# Altium PCB Soldeerstation.PcbDoc
Units mil, origin at the board's own origin, x right, y up, seen from the top; angles counter-clockwise.
Board outline 5660 x 3530 mil, 2 copper layers (Top Layer, Bottom Layer); 76 components, 79 nets, 288 pads, 50 vias.
Unrouted connection lines stored in the file: 2.
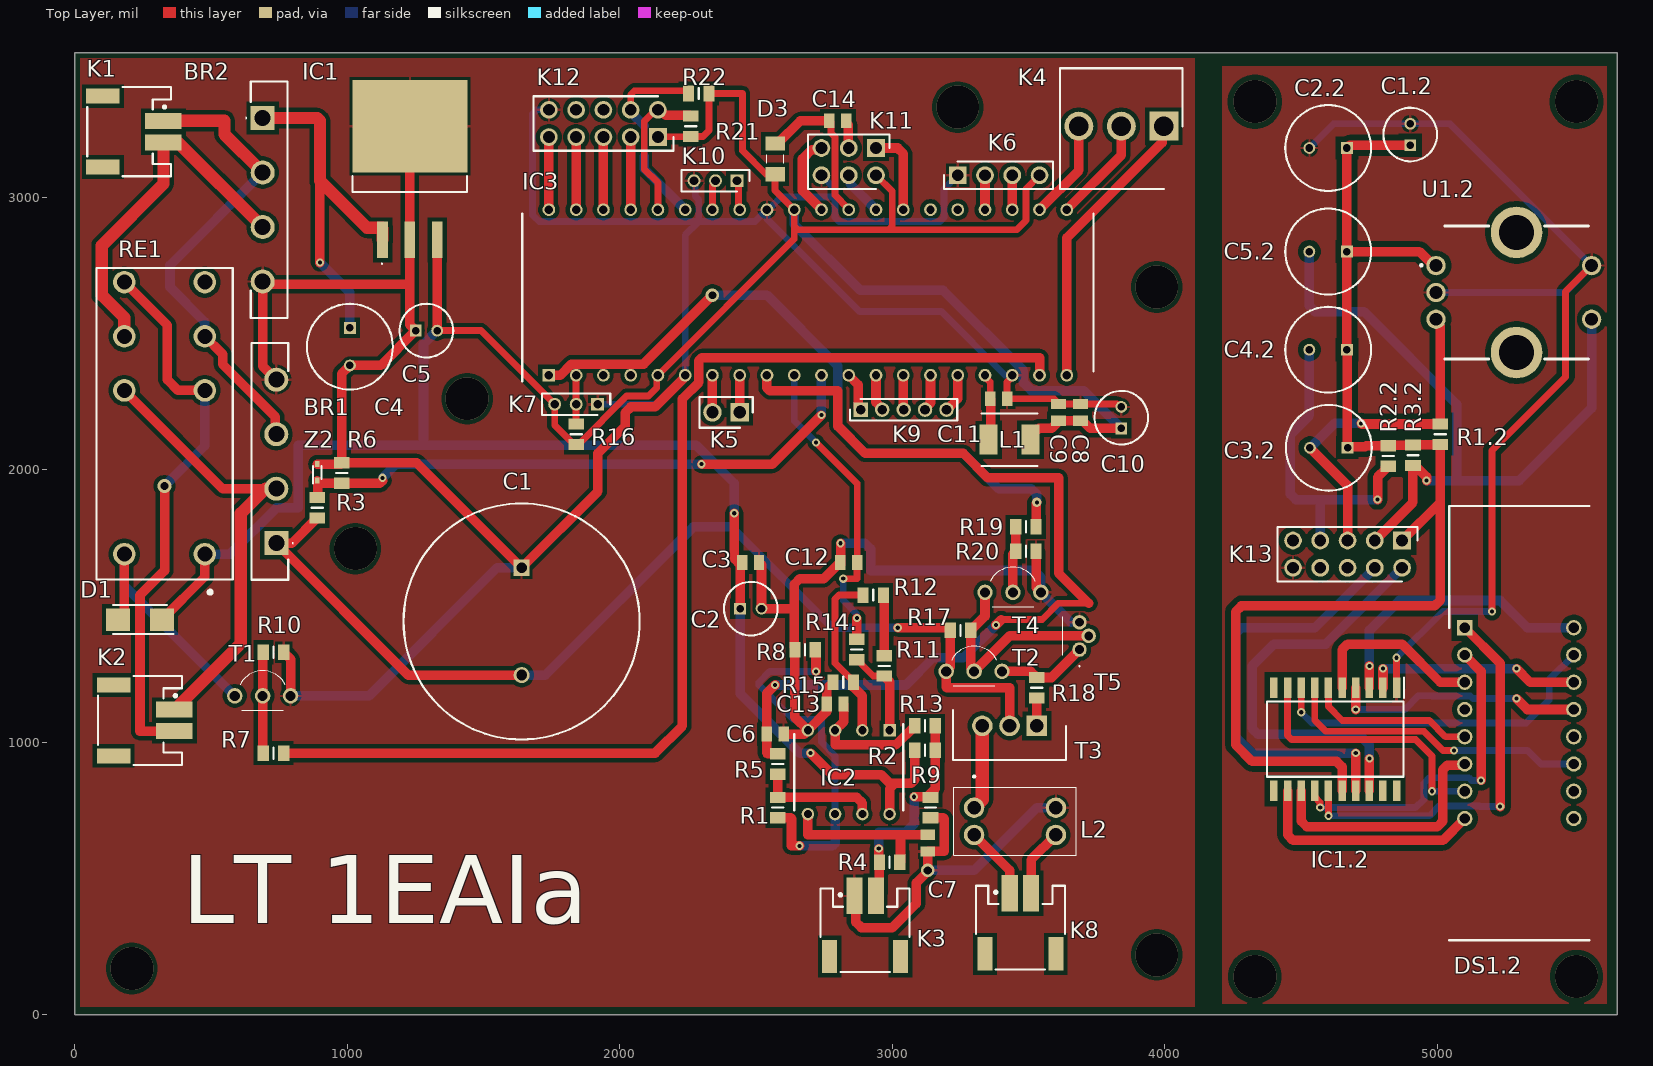
[diagram p0: Top Layer view]
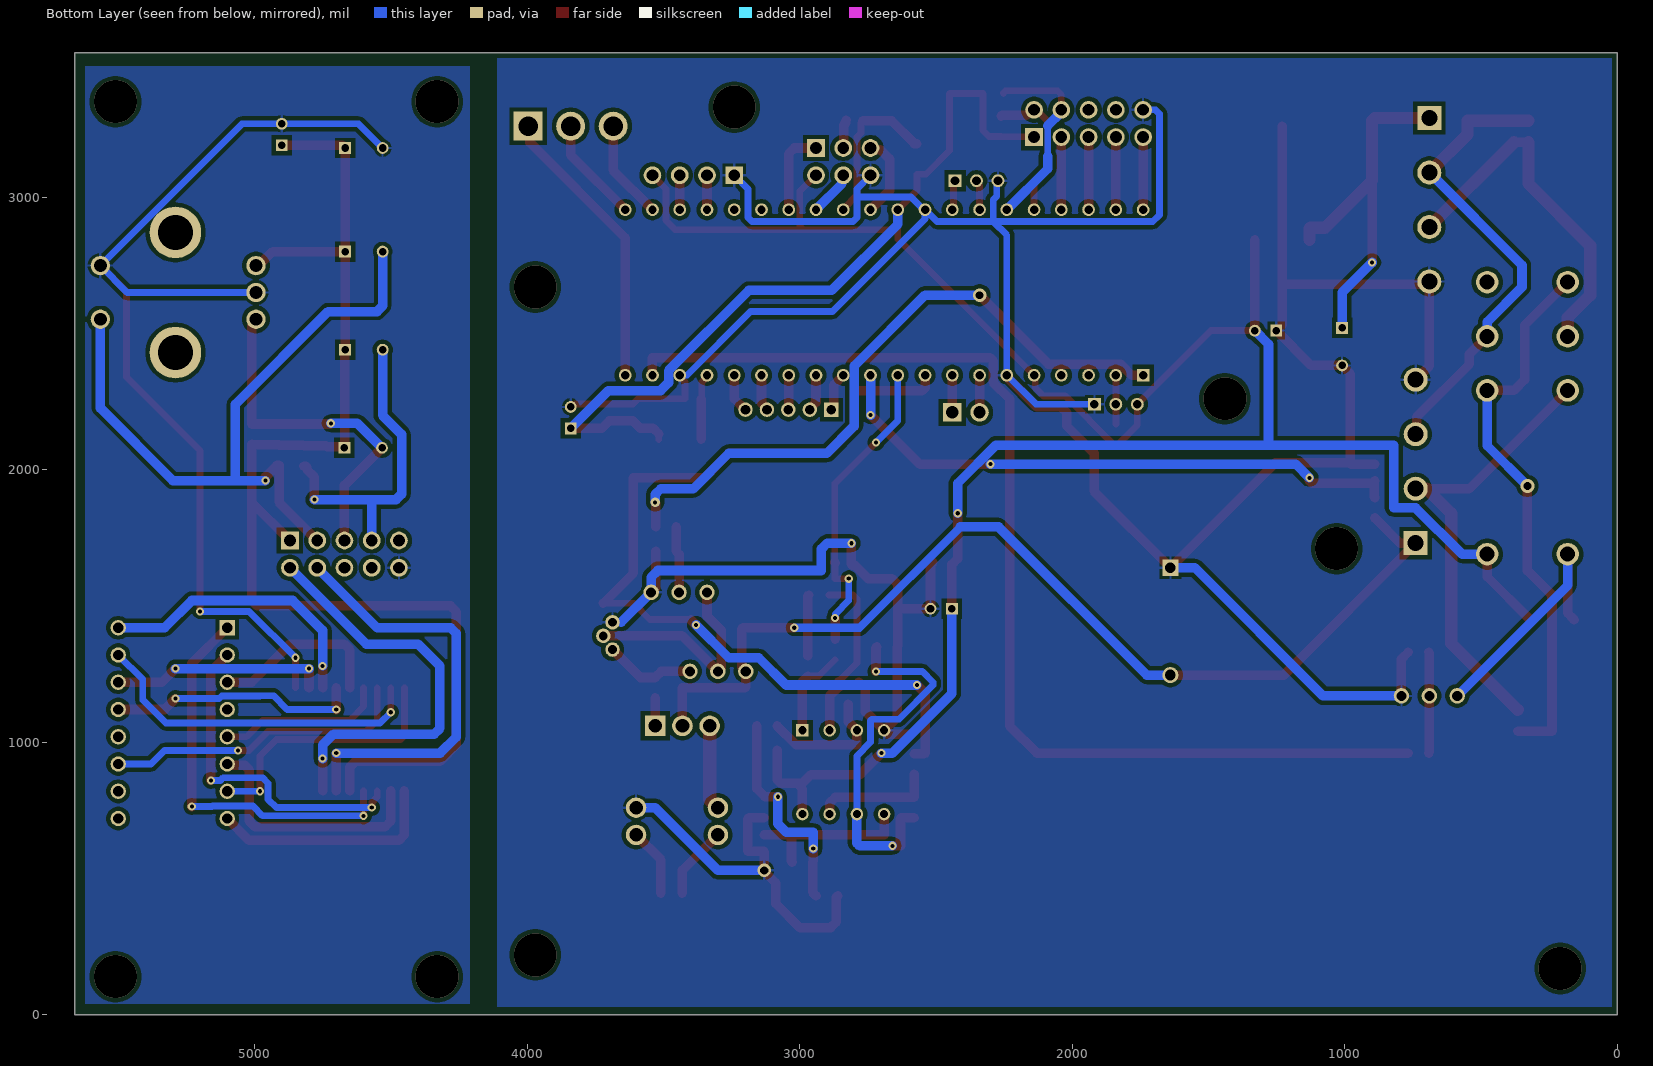
[diagram p1: Bottom Layer view, seen from below]
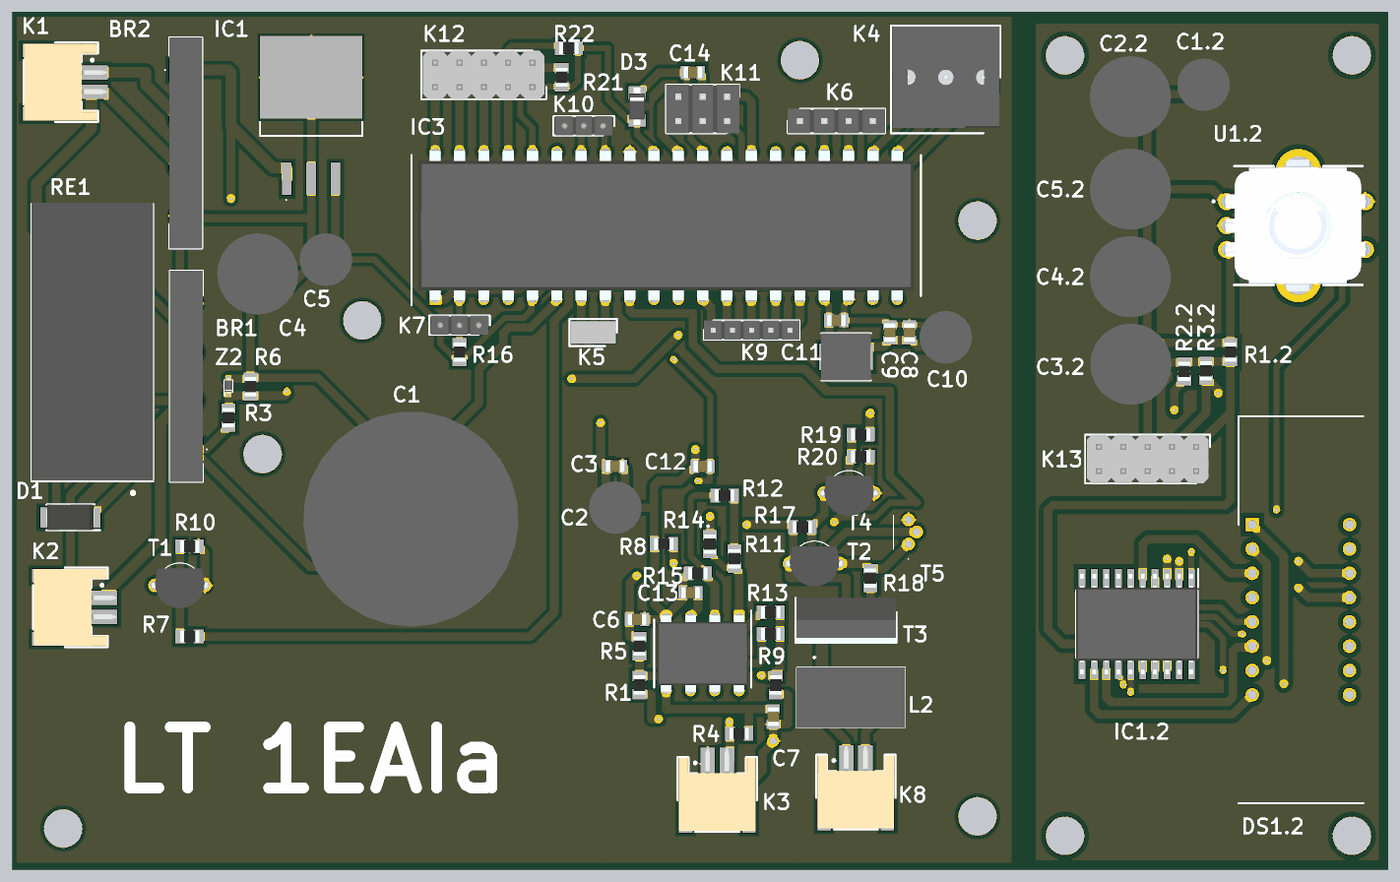
[diagram p2: 3D render of the assembled board from above, using the file's embedded part models]

## Layer stack, top to bottom
Top Solder: solder mask 0.4, Solder Resist, Dk 3.5
Top Layer: signal copper 1.4
Dielectric 1: dielectric 12.6, FR-4, Dk 4.8
Bottom Layer: signal copper 1.4
Bottom Solder: solder mask 0.4, Solder Resist, Dk 3.5

## Board outline
0,3530 5660,3530 5660,0 0,0
board region "Layer Stack Region 1": 4150,0 0,0 0,3530 4149.89,3530
board region "Layer Stack Region 1": 4149.89,3530 5660,3530 5660,0 4150,0

## Design rules (kind name [scope] priority, off if disabled: settings)
Clearance Clearance_10 [InNamedPolygon('GND_L02_P004')] p1: gap=15 ignorepadtopadclearanceinfootprint=FALSE
Clearance Clearance_9 [InNamedPolygon('NONET_L02_P003')] p2: gap=15 ignorepadtopadclearanceinfootprint=FALSE
Clearance Clearance_8 [InNamedPolygon('GND_L01_P005')] p3: gap=15 ignorepadtopadclearanceinfootprint=FALSE
Clearance Clearance_7 [InNamedPolygon('NONET_L01_P002')] p4: gap=20 ignorepadtopadclearanceinfootprint=FALSE
Clearance Clearance_6 [InNamedPolygon('NONET_L02_P000')] p5: gap=20 ignorepadtopadclearanceinfootprint=FALSE
Clearance Clearance_5 [InNamedPolygon('NONET_L01_P001')] p6: gap=20 ignorepadtopadclearanceinfootprint=FALSE
Clearance Clearance_4 [InNamedPolygon('NONET_L01_P001')] p7: gap=10 ignorepadtopadclearanceinfootprint=FALSE except(0: Arc-Hole Track-Hole SMDPad-Hole THPad-Hole Via-Hole Fill-Hole Poly-Hole Region-Hole Text-Hole; 20: Fill-Fill Fill-Poly Fill-Region Poly-Poly Poly-Region Region-Region)
Clearance Clearance_3 [InNamedPolygon('NONET_L02_P000')] p8: gap=10 ignorepadtopadclearanceinfootprint=FALSE except(0: Arc-Hole Track-Hole SMDPad-Hole THPad-Hole Via-Hole Fill-Hole Poly-Hole Region-Hole Text-Hole; 20: Fill-Text Poly-Text Region-Text)
Clearance Clearance_2 [InNamedPolygon('NONET_L02_P000')] p9: gap=10 ignorepadtopadclearanceinfootprint=FALSE except(0: Arc-Hole Track-Hole SMDPad-Hole THPad-Hole Via-Hole Fill-Hole Poly-Hole Region-Hole Text-Hole; 20: Fill-Fill Fill-Poly Fill-Region Poly-Poly Poly-Region Region-Region)
Clearance Clearance_1 [InNamedPolygon('NONET_L02_P000')] p10: gap=10 ignorepadtopadclearanceinfootprint=FALSE except(0: Arc-Hole Track-Hole SMDPad-Hole THPad-Hole Via-Hole Fill-Hole Poly-Hole Region-Hole Text-Hole)
Clearance [All] p11: gap=0.25 ignorepadtopadclearanceinfootprint=FALSE except(0: Arc-Hole Track-Hole SMDPad-Hole THPad-Hole Via-Hole Fill-Hole Poly-Hole Region-Hole Text-Hole)
HoleSize [All] p1: absolutevalues=TRUE maxlimit=200 minlimit=1 maxpercent=80.000 minpercent=20.000
PolygonConnect [All] p1: connectstyle=Relief reliefconductorwidth=10 reliefentries=4 polygonreliefangle="90 Angle" airgapwidth=10
RoutingVias [All] p1: holewidth=43.31 width=43.31 viastyle="Through Hole" minholewidth=43.31 minwidth=43.31 maxholewidth=43.31 maxwidth=43.31
SolderMaskExpansion [All] p1: expansion=4 istentingtop=FALSE
Width [All] p1: maxlimit=50 minlimit=20 preferedwidth=35 minimp=50.000000 maximp=50.000000 favimp=50.000000
29 further rules are at their usual default settings.

## Classes and differential pairs
component class Voeding: BR1 BR2 C1 C4 C5 D1 IC1 K1 K2 R3 R6 R7 R10 RE1 T1 Z2
component class Display: C1.2 C2.2 C3.2 C4.2 C5.2 DS1.2 IC1.2 K13 R1.2 R2.2 R3.2 U1.2
component class Boutconectie: C2 C3 C6 C7 C12 C13 IC2 K3 K8 L2 R1 R2 R4 R5 R8 R9 R11 R12 R13 R14. R15 R17 R18 R19 R20 T2 T3 T4 T5
component class Atmega: C8 C9 C10 C11 C14 D3 IC3 K4 K5 K6 K7 K9 K10 K11 K12 L1 R16 R21 R22

## Components (designator, comment, footprint, x,y, rotation, side; value= is the part's Value field where it differs from the comment)
BR1 "GBU6J-E3_45" GBU6JE345 740,1730 r270 top
BR2 "GBU6J-E3_45" GBU6JE345 690,3290 r90 top
C1 "4700µ" CAPPRD1000W80D2200H4100 1640,1640 r270 top
C1.2 "100µ" CAPPRD200W52D500H1250 4900,3190 r90 top
C2 "10µ" CAPPRD200W52D500H1250 2441.26,1490 r0 top
C2.2 "860010674014" CAPPRD350W52D800H1300 4667.8,3180 r180 top
C3 "" CAPC2012X95N 2480,1660 r180 top
C3.2 "860010674014" CAPPRD350W52D800H1300 4670,2080 r180 top
C4 "100µ" CAPPRD350W52D800H1300 1010,2520 r270 top
C4.2 "860010674014" CAPPRD350W52D800H1300 4667.8,2440 r180 top
C5 "10µ" CAPPRD200W52D500H1250 1251.26,2510 r0 top
C5.2 "860010674014" CAPPRD350W52D800H1300 4667.8,2800 r180 top
C6 "" CAPC2012X95N 2570,1030 r180 top
C7 "" CAPC2012X95N 3130,630 r90 top
C8 "" CAPC2012X95N 3690,2210 r270 top
C9 "" CAPC2012X95N 3610,2210 r270 top
C10 "10µ" CAPPRD200W52D500H1250 3840,2151.26 r90 top
C11 "" CAPC2012X95N 3390,2260 r180 top
C12 "" CAPC2012X95N 2840,1660 r0 top
C13 "" CAPC2012X95N 2790,1140 r0 top
C14 "" CAPC2012X95N 2800,3280 r180 top
D1 "1N4007_SMD" DIOM5027X262N 240,1450 r180 top
D3 "1N4148" 1N4148WRHG 2570,3140 r90 top
DS1.2 "TDCG1050M" DIPS1016W75P254L4020H725Q16N 5100,1420 r0 top
IC1 "TL780-05CKTTR" TL78005CKTTR 1230,3108.23 r0 top
IC1.2 "TM1637__SOP_" SOIC127P1045X280-20N 4625,1011.02 r270 top
IC2 "MCP6002-E_P" DIP781W56P254L950H533Q8N 2840,890 r270 top
IC3 "ATMEGA4809-PF" DIP1543W58P254L5175H635Q40N 2690,2650 r90 top
K1 "620102131822" 620102131822 200,3240 r270 top
K2 "620102131822" 620102131822 240,1080 r270 top
K3 "620102131822" 620102131822 2900,310 r0 top
K4 "09-65-2038" SHDR3W160P0X396_1X3_1112X1062X1425P 3995.91,3260 r0 top
K5 "5-146277-2" HDRV2W67P0X254_1X2_467X234X823P 2440,2210 r180 top
K6 "" HDRV4W64P0X254_1X4_1016X254X864P 3240,3080 r0 top
K7 "" HDRV3W60P0X200_1X3_600X200X525P 1918.74,2240 r180 top
K8 "620102131822" 620102131822 3470,320 r0 top
K9 "M22-2010505" HDRV5W50P0X200_1X5_1000X200X530P 2883.78,2220 r0 top
K10 "" HDRV3W60P0X200_1X3_600X200X525P 2430,3060 r180 top
K11 "M20-9980346" HDRV6W64P254_2X3_762X508X868P 2940,3180 r180 top
K12 "M20-9720546" HDRV10W64P254_2X5_1270X508X954P#1 2140,3220 r180 top
K13 "M20-9720546" HDRV10W64P254_2X5_1270X508X954P#2 4870,1740 r180 top
L1 "FDSD0518-H-100M=P3" FDSD0518H100MP3 3430,2110 r0 top
L2 "CM2545X171B-10" CM2545X171B10 3300,760 r270 top
R1 "" RESC2012X90N 2580,760 r90 top
R1.2 "" RESC2012X90N 5010,2130 r270 top
R2 "" RESC2012X90N 3120,970 r180 top
R2.2 "" RESC2012X90N 4820,2050 r90 top
R3 "" RESC2012X90N 890,1860 r270 top
R3.2 "" RESC2012X90N 4910,2052.6 r90 top
R4 "" RESC2012X90N 2990,560 r0 top
R5 "" RESC2012X90N 2580,920 r90 top
R6 "" RESC2012X90N 980,1987.4 r270 top
R7 "" RESC2012X90N 730,960 r180 top
R8 "" RESC2012X90N 2680,1340 r0 top
R9 "" RESC2012X90N 3140,760 r90 top
R10 "" RESC2012X90N 730,1330 r180 top
R11 "" RESC2012X90N 2970,1280 r270 top
R12 "" RESC2012X90N 2930,1540 r0 top
R13 "" RESC2012X90N 3120,1060 r180 top
R14. "" RESC2012X90N 2870,1340 r270 top (schematic designator R14)
R15 "" RESC2012X90N 2820,1220 r0 top
R16 "" RESC2012X90N 1840,2130 r270 top
R17 "" RESC2012X90N 3250,1410 r180 top
R18 "" RESC2012X90N 3530,1200 r90 top
R19 "" RESC2012X90N 3490,1790 r180 top
R20 "" RESC2012X90N 3490,1700 r180 top
R21 "" RESC2012X90N 2260,3260 r270 top
R22 "" RESC2012X90N 2290,3380 r0 top
RE1 "RT424005" RT42 330,1690 r90 top
T1 "BC547ATA" TO-92_(TO-226) 587.64,1170 r180 top
T2 "BC547ATA" TO-92_(TO-226) 3197.64,1260 r180 top
T3 "IRF9Z34NPBF" TO254P469X1042X1967-3P 3530,1060 r180 top
T4 "BC547ATA" TO-92_(TO-226) 3340,1550 r180 top
T5 "BC557C" BC557C 3686.54,1340 r90 top
U1.2 "PEC11R-4225F-S0024" PEC12R-4XXXF-SXXXX_1 5290,2650 r270 top
Z2 "5V1" SODFL1608X65N 890,1990 r90 top

## Footprints (in the part's own frame and the unit in brackets; to place one, negate y for a bottom-side part, rotate by r counter-clockwise, add the part's x,y. Pads: shape width x height; smd on the part's side, far side on the other; paste and mask are expansions set on the pad)
1N4148WRHG [mm]
  rect 1.34x1.8 smd: 1(-1.43,0) 2(1.43,0)
  silkscreen extent -0.4,-0.8 0.4,0.8, body extent -1.95,-0.85 1.95,0.85, height 1.15
620102131822 [mm] "2.00mm SMT Male Horizontal Shrouded Header, 2p"
  rect 1.5x3.4 smd: 1(-1,3.2) 2(1,3.2)
  rect 1.4x3.1 smd: MP1(-3.3,-2.45) MP2(3.3,-2.45)
  silkscreen extent -4.15,-3.9 4.15,3.9, body extent -4,-3.8 4,4.8, height 5.57
BC557C [mm]
  round 1.35 hole 0.81: 1(0,0) 2(1.27,-0.85) 3(2.54,0)
  silkscreen extent -1.6,-0.05 3.07,1.55
CAPC2012X95N [mm]
  rect 0.96x1.39 smd: 1(-0.79,0) 2(0.79,0)
  body extent -1,-0.63 1,0.63, height 0.95
CAPPRD200W52D500H1250 [mm]
  rect 1.1x1.1 hole 0.7: 1(0,0)
  round 1.1 hole 0.7: 2(2,0)
  silkscreen extent -1.5,-2.5 3.5,2.5, body extent -1.75,-2.75 3.75,2.75, height 12.5
CAPPRD350W52D800H1300 [mm]
  rect 1.1x1.1 hole 0.7: 1(0,0)
  round 1.1 hole 0.7: 2(3.5,0)
  silkscreen extent -2.25,-4 5.75,4, body extent -2.5,-4.25 6,4.25, height 13
CAPPRD1000W80D2200H4100 [mm]
  rect 1.5x1.5 hole 1: 1(0,0)
  round 1.5 hole 1: 2(10,0)
  silkscreen extent -6,-11 16,11, body extent -6.25,-11.25 16.25,11.25, height 41
CM2545X171B10 [mil]
  round 75 hole 50: 1(0,0) 2(100,0) 3(100,300) 4(0,300)
  silkscreen extent -118,-74 174,374, body extent -74,-74 174,374, height 378
DIOM5027X262N [mm]
  rect 2.2x2.1 smd: 1(-2.05,0) 2(2.05,0)
  silkscreen extent -3.1,-1.35 2.52,1.35, body extent -2.52,-1.35 2.52,1.35, height 2.62
DIP781W56P254L950H533Q8N [mm]
  rect 1.158x1.158 hole 0.758: 1(-3.905,3.81)
  round 1.158 hole 0.758: 2(-3.905,1.27) 3(-3.905,-1.27) 4(-3.905,-3.81) 5(3.905,-3.81) 6(3.905,-1.27) 7(3.905,1.27) 8(3.905,3.81)
  silkscreen extent -4.48,-5.08 3.56,5.08, body extent -4.04,-4.75 4.04,4.75, height 5.33
DIP1543W58P254L5175H635Q40N [mm]
  rect 1.184x1.184 hole 0.784: 1(-7.715,24.13)
  round 1.184 hole 0.784: 2(-7.715,21.59) 3(-7.715,19.05) 4(-7.715,16.51) 5(-7.715,13.97) 6(-7.715,11.43) 7(-7.715,8.89) 8(-7.715,6.35) 9(-7.715,3.81) 10(-7.715,1.27) 11(-7.715,-1.27) 12(-7.715,-3.81) 13(-7.715,-6.35) 14(-7.715,-8.89) 15(-7.715,-11.43) 16(-7.715,-13.97) 17(-7.715,-16.51) 18(-7.715,-19.05) 19(-7.715,-21.59) 20(-7.715,-24.13) 21(7.715,-24.13) 22(7.715,-21.59) 23(7.715,-19.05) 24(7.715,-16.51) 25(7.715,-13.97) 26(7.715,-11.43) 27(7.715,-8.89) 28(7.715,-6.35) 29(7.715,-3.81) 30(7.715,-1.27) 31(7.715,1.27) 32(7.715,3.81) 33(7.715,6.35) 34(7.715,8.89) 35(7.715,11.43) 36(7.715,13.97) 37(7.715,16.51) 38(7.715,19.05) 39(7.715,21.59) 40(7.715,24.13)
  silkscreen extent -8.31,-26.61 7.37,26.61, body extent -7.86,-25.88 7.86,25.88, height 6.35
DIPS1016W75P254L4020H725Q16N [mm]
  rect 1.425x1.425 hole 0.95: 1(0,0)
  round 1.425 hole 0.95: 2(0,-2.54) 3(0,-5.08) 4(0,-7.62) 5(0,-10.16) 6(0,-12.7) 7(0,-15.24) 8(0,-17.78) 9(10.16,-17.78) 10(10.16,-15.24) 11(10.16,-12.7) 12(10.16,-10.16) 13(10.16,-7.62) 14(10.16,-5.08) 15(10.16,-2.54) 16(10.16,0)
  silkscreen extent -1.45,-29.12 11.61,11.34
FDSD0518H100MP3 [mm]
  rect 1.7x2.8 smd: 1(-1.95,0) 2(1.95,0)
  silkscreen extent -2.6,-2.45 2.6,2.45, body extent -2.63,-2.45 2.63,2.45, height 1.9
GBU6JE345 [mm]
  rect 2.235x2.235 hole 1.49: 1(0,0)
  round 2.235 hole 1.49: 2(-5.08,0) 3(-10.16,0) 4(-15.24,0)
  silkscreen extent -18.65,-2.32 3.41,1.6, body extent -18.65,-2.32 3.4,1.11, height 18.9
HDRV2W67P0X254_1X2_467X234X823P [mm]
  rect 1.725x1.725 hole 1.15: 1(0,0)
  round 1.725 hole 1.15: 2(2.54,0)
  silkscreen extent -1.21,-1.42 3.75,1.42, body extent -1.07,-1.17 3.61,1.17, height 8.12
HDRV3W60P0X200_1X3_600X200X525P [mm]
  rect 1.2x1.2 hole 0.8: 1(0,0)
  round 1.2 hole 0.8: 2(2,0) 3(4,0)
  silkscreen extent -1.17,-1 5.18,1, body extent -1,-1 5,1, height 5.25
HDRV4W64P0X254_1X4_1016X254X864P [mm]
  rect 1.65x1.65 hole 1.1: 1(0,0)
  round 1.65 hole 1.1: 2(2.54,0) 3(5.08,0) 4(7.62,0)
  silkscreen extent -1.27,-1.27 8.89,1.27, body extent -1.27,-1.27 8.89,1.27, height 8.64
HDRV5W50P0X200_1X5_1000X200X530P [mm]
  rect 1.35x1.35 hole 0.9: 1(0,0)
  round 1.35 hole 0.9: 2(2,0) 3(4,0) 4(6,0) 5(8,0)
  silkscreen extent -1,-1 9,1, body extent -1,-1 9,1, height 5.3
HDRV6W64P254_2X3_762X508X868P [mm]
  rect 1.65x1.65 hole 1.1: 1(0,0)
  round 1.65 hole 1.1: 2(0,2.54) 3(2.54,0) 4(2.54,2.54) 5(5.08,0) 6(5.08,2.54)
  silkscreen extent -1.27,-1.27 6.35,3.81, body extent -1.27,-1.27 6.35,3.81, height 8.68
HDRV10W64P254_2X5_1270X508X954P#1 [mm]
  rect 1.65x1.65 hole 1.1: 1(0,0)
  round 1.65 hole 1.1: 2(0,-2.54) 3(2.54,0) 4(2.54,-2.54) 5(5.08,0) 6(5.08,-2.54) 7(7.62,0) 8(7.62,-2.54) 9(10.16,0) 10(10.16,-2.54)
  silkscreen extent -1.45,-3.81 11.61,1.27, body extent -1.27,-3.81 11.43,1.27, height 8.15
HDRV10W64P254_2X5_1270X508X954P#2 [mm]
  rect 1.65x1.65 hole 1.1: 1(0,0)
  round 1.65 hole 1.1: 2(0,2.54) 3(2.54,0) 4(2.54,2.54) 5(5.08,0) 6(5.08,2.54) 7(7.62,0) 8(7.62,2.54) 9(10.16,0) 10(10.16,2.54)
  silkscreen extent -1.45,-1.27 11.61,3.81, body extent -1.27,-1.27 11.43,3.81, height 9.55
PEC12R-4XXXF-SXXXX_1 [mm]
  round 1.8 hole 1.2: 1(-2.5,-7.5) 2(2.5,-7.5) 3(0,-7.5) 4(-2.5,7) 5(2.5,7)
  round 4.8 hole 3.28: 6(5.6,0) 7(-5.6,0)
  silkscreen extent -6.2,-8.94 6.2,6.7, body extent -7,-7.75 6.99,7.15, height 31.51
RESC2012X90N [mm]
  rect 1.05x1.45 smd: 1(-0.95,0) 2(0.95,0)
  silkscreen extent 0,-0.53 0,0.53, body extent -1,-0.63 1,0.63, height 0.9
RT42 [mm]
  round 2.1 hole 1.4: 1(0,-3.75) 2(15.26,-3.75) 3(20.3,-3.75) 4(25.34,-3.75) 5(25.34,3.75) 6(20.3,3.75) 7(15.26,3.75) 8(0,3.75)
  silkscreen extent -3.67,-6.35 26.65,6.35, body extent -2.21,-6.35 26.79,6.35, height 15.86
SHDR3W160P0X396_1X3_1112X1062X1425P [mm]
  rect 2.7x2.7 hole 1.8: 1(0,0)
  round 2.7 hole 1.8: 2(-3.96,0) 3(-7.92,0)
  silkscreen extent -9.67,-5.85 1.75,5.4, body extent -9.52,-5.31 1.6,5.31, height 14.25
SODFL1608X65N [mm]
  rect 0.55x0.42 smd: 1(-0.775,0) 2(0.775,0)
  silkscreen extent -1.05,-0.4 0.6,0.4, body extent -0.8,-0.4 0.8,0.4, height 0.65
SOIC127P1045X280-20N [mm]
  rect 1.9x0.7 smd: 1(-4.8,5.715) 2(-4.8,4.445) 3(-4.8,3.175) 4(-4.8,1.905) 5(-4.8,0.635) 6(-4.8,-0.635) 7(-4.8,-1.905) 8(-4.8,-3.175) 9(-4.8,-4.445) 10(-4.8,-5.715) 11(4.8,-5.715) 12(4.8,-4.445) 13(4.8,-3.175) 14(4.8,-1.905) 15(4.8,-0.635) 16(4.8,0.635) 17(4.8,1.905) 18(4.8,3.175) 19(4.8,4.445) 20(4.8,5.715)
  silkscreen extent -5.75,-6.35 3.5,6.42, body extent -5.23,-6.35 5.23,6.35, height 2.8
TL78005CKTTR [mm]
  rect 1x3.4 smd: 1(-2.54,-6.745) 2(0,-6.745) 3(2.54,-6.745)
  rect 10.7x8.6 smd: 4(0,3.855)
  silkscreen extent -5.33,-9 5.33,-0.8
TO254P469X1042X1967-3P [mm]
  rect 1.92x1.92 hole 1.28: 1(0,0)
  round 1.92 hole 1.28: 2(2.54,0) 3(5.08,0)
  silkscreen extent -2.73,-1.49 7.81,3.2, body extent -2.67,-1.5 7.75,3.19, height 18.84
TO-92_(TO-226) [mm]
  round 1.44 hole 0.94: 1(0,0) 2(-2.6,0) 3(-5.2,0)
  silkscreen extent -4.7,-2.35 -0.5,1.34, body extent -5.67,-1.79 0.49,2.4, height 9.2

## Part data
BR1 BR2: "Bridge Rectifier", Manufacturer_Name=Vishay, Manufacturer_Part_Number=GBU6J-E3/45, Datasheet Link=http://www.vishay.com/docs/88615/gbu6a.pdf, Height=18.8mm
C1: library part 860010683032, "Capacitor", Manufacturer_Name="Wurth Elektronik", Mouser Part Number=710-860010683032, Datasheet Link=https://componentsearchengine.com/Datasheets/2/860010683032.pdf, Height=41mm, Manufacturer_Part_Number=860010683032, Mouser Price/Stock=https://www.mouser.co.uk/ProductDetail/Wurth-Elektronik/860010683032?qs=0KOYDY2FL2%252Biyra9tgGF6Q%3D%3D
C1.2 C2 C5 C10: library part 860010672009, "Capacitor Polarised", Manufacturer_Name="Wurth Elektronik", Mouser Part Number=710-860010672009, Datasheet Link=https://componentsearchengine.com/Datasheets/2/860010672009.pdf, Height=12.5mm, Manufacturer_Part_Number=860010672009, Mouser Price/Stock=https://www.mouser.com/Search/Refine.aspx?Keyword=710-860010672009
C2.2 C3.2 C4.2 C5.2: "Capacitor", Manufacturer_Name="Wurth Elektronik", Mouser Part Number=710-860010674014, Datasheet Link=http://uk.rs-online.com/web/p/products/8397074, Height=13mm, Manufacturer_Part_Number=860010674014, Mouser Price/Stock=https://www.mouser.co.uk/ProductDetail/Wurth-Elektronik/860010674014?qs=0KOYDY2FL2%2Fk%2F1RkUOIquw%3D%3D
C3 C6 C7 C8 C9 C11 C12 C13 C14: library part CC0805KPX7R9BB104, "Capacitor", Manufacturer_Name=KEMET, Datasheet Link=https://www.yageo.com/upload/media/product/productsearch/datasheet/mlcc/UPY-GPHC_X7R_6.3V-to-50V_20.pdf, Height=0.95mm, Manufacturer_Part_Number=CC0805KPX7R9BB104
C4: library part 860010674014, "Capacitor", Manufacturer_Name="Wurth Elektronik", Mouser Part Number=710-860010674014, Datasheet Link=http://uk.rs-online.com/web/p/products/8397074, Height=13mm, Manufacturer_Part_Number=860010674014, Mouser Price/Stock=https://www.mouser.co.uk/ProductDetail/Wurth-Elektronik/860010674014?qs=0KOYDY2FL2%2Fk%2F1RkUOIquw%3D%3D
D1: "Diode", Manufacturer_Name=MULTICOMP, Manufacturer_Part_Number="1N4007 SMD", Datasheet Link="https://componentsearchengine.com/Datasheets/2/1N4007 SMD.pdf", Height=2.62mm
D3: library part 1N4148W_RHG, "Diode", Arrow Part Number="1N4148W RHG", Manufacturer_Name="Taiwan Semiconductor", Mouser Part Number=821-1N4148WRHG, Arrow Price/Stock=https://www.arrow.com/en/products/1n4148wrhg/taiwan-semiconductor?region=nac, Datasheet Link="https://mouser.componentsearchengine.com/Datasheets/1/1N4148W RHG.pdf", Height=1.15mm, Manufacturer_Part_Number="1N4148W RHG", Mouser Price/Stock=https://www.mouser.co.uk/ProductDetail/Taiwan-Semiconductor/1N4148W-RHG?qs=KwaGCOX4wIag2YPLXylAvA%3D%3D
DS1.2: "Display", Manufacturer_Name=Vishay, Mouser Part Number=78-TDCG1050, Arrow Part Number=TDCG1050M, Arrow Price/Stock=https://www.arrow.com/en/products/tdcg1050m/vishay?region=nac, Datasheet Link=https://www.vishay.com/docs/83180/tdcx10x0m.pdf, Height=7.25mm, Manufacturer_Part_Number=TDCG1050M, Mouser Price/Stock=https://www.mouser.co.uk/ProductDetail/Vishay-Semiconductors/TDCG1050M?qs=RzxYCzJDjPUa0IQ9xsk9iw%3D%3D
IC1: "Integrated Circuit", Manufacturer_Name="Texas Instruments", Mouser Part Number=595-TL780-05CKTTR, Arrow Part Number=TL780-05CKTTR, Arrow Price/Stock=https://www.arrow.com/en/products/tl780-05ckttr/texas-instruments?region=nac, Datasheet Link=http://www.ti.com/general/docs/suppproductinfo.tsp?distId=26&gotoUrl=http%3A%2F%2Fwww.ti.com%2Flit%2Fgpn%2Ftl780, Height=5.08mm, Manufacturer_Part_Number=TL780-05CKTTR, Mouser Price/Stock=https://www.mouser.co.uk/ProductDetail/Texas-Instruments/TL780-05CKTTR?qs=7kv20MEVUlhtPP21hgiOlA%3D%3D
IC1.2: "Integrated Circuit", Manufacturer_Name="TITAN MICRO ELECTRONICS", Manufacturer_Part_Number="TM1637 (SOP)", Datasheet Link=https://www.mcielectronics.cl/website_MCI/static/documents/Datasheet_TM1637.pdf, Height=2.8mm
IC2: "Integrated Circuit", Arrow Part Number=MCP6002-E/P, Manufacturer_Name=Microchip, Mouser Part Number=579-MCP6002-E/P, Arrow Price/Stock=https://www.arrow.com/en/products/mcp6002-ep/microchip-technology?region=nac, Datasheet Link=http://componentsearchengine.com/Datasheets/3/MCP6002-E_P.pdf, Height=5.334mm, Manufacturer_Part_Number=MCP6002-E/P, Mouser Price/Stock=https://www.mouser.co.uk/ProductDetail/Microchip-Technology/MCP6002-E-P?qs=hul3WK2zl4pqRWzdnAsu%2FQ%3D%3D
IC3: "Integrated Circuit", Manufacturer_Name=Microchip, Mouser Part Number=556-ATMEGA4809-PF, Datasheet Link=http://ww1.microchip.com/downloads/en/DeviceDoc/40-pin-Data-Sheet-megaAVR-0-series-DS40002104A.pdf, Height=6.35mm, Manufacturer_Part_Number=ATMEGA4809-PF, Mouser Price/Stock=https://www.mouser.co.uk/ProductDetail/Microchip-Technology-Atmel/ATMEGA4809-PF?qs=T3oQrply3y9UlpZbCygk%252BQ%3D%3D
K1 K2 K3 K8: library part CMP-1502-00669-1, "Male Shrouded Header WR-WTB, SMT, Right Angled, pitch 2 mm, 1 x 2 position", Contact Resistance=20mOhm, Manufacturer="Wurth Elektronik", Operating Temperature=-25to85degC, Working Voltage=100VAC, Datasheet URL=https://katalog.we-online.de/em/datasheet/6201xx131822.pdf, Gender=Male, Manufacturer URL=http://www.we-online.de, Mounting Technology=SMT, Orientation=RightAngled, Package Reference=620102131822, Packaging=TapeandReel, Part Number=620102131822, Pitch=2mm, Position=1x2, Publisher=WurthElektronik
K4: "Connector", Manufacturer_Name=Molex, Mouser Part Number=538-09-65-2038, Datasheet Link=https://www.molex.com/pdm_docs/sd/009652038_sd.pdf, Height=14.25mm, Manufacturer_Part_Number=09-65-2038, Mouser Price/Stock=https://www.mouser.co.uk/ProductDetail/Molex/09-65-2038?qs=A%252B%2FNCR0PvNU%2FSwDn3lpSlg%3D%3D
K5: "Connector", Manufacturer_Name="TE Connectivity", Mouser2 Part Number=571-5-146277-2, Datasheet Link=https://componentsearchengine.com//5-146277-2.pdf, Height=8.23mm, Manufacturer_Part_Number=5-146277-2, Mouser2 Price/Stock=https://www.mouser.com/Search/Refine.aspx?Keyword=571-5-146277-2
K6: library part M20-9990445, "Connector", Manufacturer_Name=Harwin, Datasheet Link=https://cdn.harwin.com/pdfs/M20-999.pdf, Height=8.64mm, Manufacturer_Part_Number=M20-9990445
K7 K10: library part M22-2010305, "Connector", Manufacturer_Name=Harwin, Mouser2 Part Number=855-M22-2010305, Datasheet Link=https://componentsearchengine.com//M22-2010305.pdf, Height=5.25mm, Manufacturer_Part_Number=M22-2010305, Mouser2 Price/Stock=https://www.mouser.com/Search/Refine.aspx?Keyword=855-M22-2010305
K9 K12 K13: "Connector", Manufacturer_Name=Harwin
  K9: Datasheet Link=https://datasheet.datasheetarchive.com/originals/distributors/Datasheets-20/DSA-391131.pdf, Height=5.3mm, Manufacturer_Part_Number=M22-2010505
  K12 K13: Datasheet Link=https://cdn.harwin.com/pdfs/M20-972.pdf, Height=9.54mm, Manufacturer_Part_Number=M20-9720546
K11: "Connector", Manufacturer_Name=Harwin, Mouser2 Part Number=855-M20-9980346, Datasheet Link=https://componentsearchengine.com//M20-9980346.pdf, Height=8.68mm, Manufacturer_Part_Number=M20-9980346, Mouser2 Price/Stock=https://www.mouser.com/Search/Refine.aspx?Keyword=855-M20-9980346
L1: "Inductor", Manufacturer_Name="Murata Electronics", Manufacturer_Part_Number=FDSD0518-H-100M=P3, Datasheet Link=https://psearch.en.murata.com/inductor/product/FDSD0518-H-100M%23.html, Height=1.8mm
L2: "Transformer", Manufacturer_Name="Laird Technologies", Mouser Part Number=N/A, Arrow Part Number=CM2545X171B-10, Arrow Price/Stock=https://www.arrow.com/en/products/cm2545x171b-10/laird-technologies, Datasheet Link=https://datasheet.datasheetarchive.com/originals/dk/DKDS-7/122753.pdf, Height=9.5mm, Manufacturer_Part_Number=CM2545X171B-10, Mouser Price/Stock=https://www.mouser.co.uk/ProductDetail/Laird/CM2545X171B-10?qs=PzGy0jfpSMtNfkEypgU65A%3D%3D
R1 R1.2 R2 R2.2 R3 R3.2 R4 R5 R6 R7 R8 R9 R10 R11 R12 R13 R14. R15 R16 R17 R18 R19 R20 R21 R22: library part CFN0805-JZ-R010ELF, "Resistor", Manufacturer_Name=Bourns, Datasheet Link=https://www.bourns.com/docs/Product-Datasheets/CFN.pdf, Height=0.9mm, Manufacturer_Part_Number=CFN0805-JZ-R010ELF
RE1: "Relay or Contactor", Manufacturer_Name="TE Connectivity", Mouser Part Number=655-RT424005, Arrow Part Number=RT424005, Arrow Price/Stock=https://www.arrow.com/en/products/rt424005/te-connectivity?region=nac, Datasheet Link=https://www.te.com/commerce/DocumentDelivery/DDEController?Action=showdoc&DocId=Data+Sheet%7FRT2%7F1014%7Fpdf%7FEnglish%7FENG_DS_RT2_1014.pdf%7F5-1393243-9, Manufacturer_Part_Number=RT424005, Mouser Price/Stock=https://www.mouser.co.uk/ProductDetail/TE-Connectivity-Schrack/RT424005?qs=KKrrU%252BaSadKRsQcVuAjnsQ%3D%3D
T1 T2 T4: "Transistor BJT NPN", Manufacturer_Name="ON Semiconductor", Mouser Part Number=512-BC547ATA, Arrow Part Number=BC547ATA, Arrow Price/Stock=https://www.arrow.com/en/products/bc547ata/on-semiconductor?region=europe, Datasheet Link=https://www.onsemi.com/pub/Collateral/BC550-D.pdf, Manufacturer_Part_Number=BC547ATA, Mouser Price/Stock=https://www.mouser.co.uk/ProductDetail/ON-Semiconductor-Fairchild/BC547ATA?qs=ljbEvF4DwOMRdLfuzO8N4w%3D%3D
T3: "MOSFET (P-Channel)", Manufacturer_Name=Infineon, Mouser Part Number=942-IRF9Z34NPBF, Arrow Part Number=IRF9Z34NPBF, Arrow Price/Stock=https://www.arrow.com/en/products/irf9z34npbf/infineon-technologies-ag?region=nac, Datasheet Link=https://www.infineon.com/dgdl/irf9z34npbf.pdf?fileId=5546d462533600a40153561220af1ddd, Height=4.69mm, Manufacturer_Part_Number=IRF9Z34NPBF, Mouser Price/Stock=https://www.mouser.co.uk/ProductDetail/Infineon-IR/IRF9Z34NPBF?qs=9%252BKlkBgLFf16a%2FvlD%252BMCtQ%3D%3D
T5: "Transistor BJT PNP", Manufacturer_Name=NXP, Mouser Part Number=771-BC557C, Datasheet Link=http://uk.rs-online.com/web/p/products/1124775, Height=5.2mm, Manufacturer_Part_Number=BC557C, Mouser Price/Stock=https://www.mouser.co.uk/ProductDetail/NXP-Semiconductors/BC557C?qs=84A%2FDAdkstLO1yR4NjQrgg%3D%3D
U1.2: "Undefined or Miscellaneous", Manufacturer_Name=Bourns, Mouser Part Number=652-PEC11R-4225F-S24, Arrow Part Number=PEC11R-4225F-S0024, Arrow Price/Stock=https://www.arrow.com/en/products/pec11r-4225f-s0024/bourns?region=nac, Datasheet Link=https://componentsearchengine.com/Datasheets/1/PEC11R-4225F-S0024.pdf, Manufacturer_Part_Number=PEC11R-4225F-S0024, Mouser Price/Stock=https://www.mouser.co.uk/ProductDetail/Bourns/PEC11R-4225F-S0024?qs=Zq5ylnUbLm4N6UNkPX3pkQ%3D%3D
Z2: library part BZT52C12TQ-7-F, "Zener Diode", Manufacturer_Name="Diodes Inc.", Mouser Part Number=621-BZT52C12TQ-7-F, Arrow Part Number=BZT52C12TQ-7-F, Arrow Price/Stock=https://www.arrow.com/en/products/bzt52c12tq-7-f/diodes-incorporated?region=nac, Datasheet Link=https://www.diodes.com/assets/Datasheets/ds30502.pdf, Height=0.65mm, Manufacturer_Part_Number=BZT52C12TQ-7-F, Mouser Price/Stock=https://www.mouser.co.uk/ProductDetail/Diodes-Incorporated/BZT52C12TQ-7-F?qs=W0yvOO0ixfHNmW9JdWu87w%3D%3D

## Via types
v1: diameter 30, hole 15, Top Layer to Bottom Layer, 36 vias
v2: diameter 157.48, hole 157.48, Top Layer to Bottom Layer, 10 vias
v3: diameter 50, hole 28, Top Layer to Bottom Layer, 2 vias
v4: diameter 35, hole 15, Top Layer to Bottom Layer, 1 vias
v5: diameter 50, hole 30, Top Layer to Bottom Layer, 1 vias

## Nets (pads, with @x,y where several pads share a name; then routed paths per layer and width w, separated by ;. In a path a pad name is that pad's centre, name@x,y a point inside that pad or via, vN(x,y) a via of type N, cw(c..) or ccw(c..) an arc to the next point about the centre after c; other vN are vias at no path point)
+5V: C1.2.1 C2.1 C2.2.1 C3.2 C3.2.1 C4.2.1 C5.2 C5.2.1 C8.2 C9.2 C10.1 D1.1 D3.1 IC1.2.16 IC1.3 IC2.8 IC3.5 IC3.31 K6.4 K7.3 K11.2 K12.1 K13.1 L1.2 R1.2.2 R2.2 R2.2.2 R3.2.2 R16.2 R21.2 R22.2 RE1.1 U1.2.1 | length 15944.4
  Top Layer w25: C5.2 1491.26,2510 K7.3 1761.26,2163.46 1832.13,2092.6 R16.2 1847.87,2092.6 2025.28,2270 2105.36,2270 2135.86,2300.51 2135.86,2342.12 IC3.5 2640,2846.26 2640,2894.64 ; K12.1 2141.3,3221.3 2258.7,3221.3 R21.2 2305.36,3222.6 2327.4,3244.64 R22.2 2450,3380 2450,3170 2536.3,3083.7 D3.1 2570,3023.74 IC3.31 2640,2894.64 ; K11.2 3000,3020 3000,2894.64 2985.36,2880 ; L1.2@3516.77,2110 L1.2@3516.77,2131.65 ; K6.4 3490,3030 3490,2914.64 3455.36,2880 2985.36,2880 ; C9.2@3611.54,2178.9 C9.2@3620,2178.9 ; 2640,2894.64 2654.64,2880 2985.36,2880
  Top Layer w35: D1.1 477.64,1606.93 RE1.1 ; C5.2 IC1.3 ; v1(2420,1840) 2420,1673.62 2441.26,1652.36 C2.1 ; v1(2700,960) 2780,880 2960,880 2990,850 3010,850 ; IC2.8 2990,830 3010,850 ; R2.2 3082.6,862.6 3070,850 3010,850 ; L1.2@3516.77,2131.65 3537.74,2152.62 3585.26,2152.62 C9.2@3611.54,2178.9 ; C9.2@3620,2178.9 C8.2 3698.46,2178.9 3726.1,2151.26 C10.1 ; IC1.2.16 4650,909.5 4629.5,930 4320,930 4260,990 4260,1479.5 4280.5,1500 4989.5,1500 5010,1520.5 5010,1880 ; K13.1 5010,1880 ; C1.2.1 4677.8,3190 C2.2.1 C5.2.1 ; U1.2.1 4985.02,2748.43 4933.44,2800 C5.2.1 ; C5.2.1 C4.2.1 4668.9,2438.9 4668.9,2081.1 C3.2.1 4674.15,2084.15 4735.71,2084.15 4738.96,2087.4 R2.2.2 4821.3,2088.7 4908.7,2088.7 R3.2.2 4911.3,2091.3 5008.7,2091.3 R1.2.2 5010,1880
  Bottom Layer w35: RE1.1 570,1690 740,1860 820,1860 820,2090 1280,2090 ; C5.2 1280,2460 1280,2090 ; v1(2420,1840) 2420,1950 2280,2090 1280,2090 ; C2.1 2441.26,1178.74 2660,960 v1(2700,960) ; IC3.31 2640,2900 2882.61,2657.39 3186.94,2657.39 3481.06,2363.27 3481.06,2319.44 3510.5,2290 3701.26,2290 C10.1
GND: BR1.4 BR2.4 C1.1 C1.2.2 C2.2 C2.2.2 C3.1 C4.2 C5.1 C6.1 C7.1 C8.1 C9.1 C10.2 C11.1 C12.1 C13.1 IC1.2 IC1.2.1 IC1.4 IC2.4 IC3.6 IC3.18 IC3.32 K3.1 K6.1 K7.1 K10.3 K11.6 K12.10 K13.10 L2.4 R6.1 R8.1 R9.1 R10.1 R15.1 R20.1 T1.3 T4.3 T5.3 U1.2.3 U1.2.4 Z2.2 | length 18508.6
  Top Layer w25: BR2.4 BR2.4@700,2680 ; IC3.18@3440,2340.41 IC3.18@3440,2340.53 ; IC3.18 IC3.18@3440,2340.53 ; C10.2 3835.05,2230 3823.94,2241.1 C8.1 3611.54,2241.1 3592.64,2260 C11.1 3421.1,2321.63 IC3.18@3440,2340.53 ; IC1.2.1 v1(4850,1310) ; v1(5200,1480) 5200,2070 5470,2340 5470,2652.84 U1.2.4
  Top Layer w35: BR2.4 690,2380 BR1.4 ; BR2.4@700,2680 1230,2680 ; R10.1 792.36,1305.04 T1.3 ; Z2.2 975.71,2020.51 R6.1 ; IC1.4 IC1.2 1230,2680 ; IC3.6 2240,2340 2130,2230 2040.76,2230 2020.25,2209.5 2020.25,2160.25 1920,2060 1920,1920 C1.1 1255.2,2024.8 R6.1 ; C3.1 2520,1651.1 C2.2 2640,1490 ; C6.1 2676.26,1030 IC2.4 ; R15.1 2758.9,1196.3 C13.1 2758.9,1112.64 IC2.4 ; v1(2810,1730) 2810,1652.64 2807.5,1650.14 2799.04,1650.14 2748.9,1600 2660.5,1600 2640,1579.5 2640,1490 ; K3.1 2865.85,430.76 2865.85,340.5 2886.35,320 3000,320 3087.82,407.82 3087.82,483.77 3130,525.94 v5(3130,530) C7.1 3131.1,600 3190,600 3190,720 3187.4,722.6 R9.1 R9.1@3130,722.6 ; R20.1 3527.4,1567.32 T4.3 ; R6.1 980,2352.2 C4.2 1123.46,2382.2 C5.1 1230,2531.26 1230,2680 ; 2640,1490 2640,1352.6 2642.6,1350 R8.1 2642.6,1091.14 IC2.4
  Bottom Layer w25: K12.10 1694.64,3320 1680,3305.36 1680,2934.64 1704.64,2910 2290,2910 ; K7.1 2133.74,2240 IC3.6 2240,2860 2290,2910 ; K10.3 2276.78,3055.74 2276.78,3003.22 2290,2990 2290,2910 ; K11.6 2790,3030 2790,3000 ; K6.1 3190,3030 3190,2924.64 3175.36,2910 2804.64,2910 2790,2924.64 2790,3000 ; IC3.18 3413.74,2346.26 3180,2580 2880,2580 2540,2920 IC3.32 ; C2.2.2 4618.74,3268.74 C1.2.2 5045.28,3268.74 U1.2.4 5467.16,2650 U1.2.3 ; v1(4850,1310) 5020,1480 v1(5200,1480) ; 2290,2910 2496.26,2910 IC3.32 ; IC3.32 2545.85,2953.74 2592.11,3000 2790,3000
  Bottom Layer w35: T1.3 1080,1170 1550,1640 C1.1 ; v1(2810,1730) 2899.5,1730 2920,1709.5 2920,1630 3520,1630 3544.72,1605.28 T4.3 3654.72,1440 ; v5(3130,530) 3300,530 3530,760 L2.4
NetBR1_2: BR1.2 K2.1 RE1.7 | length 1656.1
  Top Layer w35: RE1.7 543.15,1930 700,1930 BR1.2
  Top Layer w45: K2.1 610,1363.39 610,1840 BR1.2@700,1930
NetBR1_3: BR1.3 BR2.2 K1.1 RE1.3 | length 1734.6
  Top Layer w35: K1.1 K1.1@326.61,3280 ; RE1.3 543.23,2423.62 543.23,2386.77 736.77,2193.23 736.77,2133.23 BR1.3
  Top Layer w45: K1.1@326.61,3280 550,3280 550,3230 BR2.2
  Bottom Layer w35: RE1.3 477.64,2542.36 350,2670 350,2750 BR2.2
NetBR2_1: BR2.1 C4.1 IC1.1 | length 1364.1
  Top Layer w35: 890,3290 900,3280 ; v1(900,2760) 900,3060
  Top Layer w45: BR2.1 890,3290 ; 900,3280 900,3060 1072.89,2887.11 1127.19,2887.11 1130,2884.29 IC1.1
  Bottom Layer w35: v1(900,2760) 1010,2650 C4.1
NetBR2_3: BR2.3 K1.2 RE1.6 | length 1331.8
  Top Layer w35: K1.2 K1.2@379.37,3200.63
  Top Layer w45: RE1.6 182.36,2557.64 100,2640 100,2822.71 325.98,3048.7 K1.2 ; K1.2@379.37,3200.63 BR2.3
NetC3.2_2: C3.2.2 K13.5 R1.2.1 U1.2.2 | length 1303.7
  Top Layer w35: C3.2.2 4670,1942.2 K13.5 ; v1(4720,2170) 4722.6,2167.4 R1.2.1 5010,2526.59 4994.72,2541.87 U1.2.2
  Bottom Layer w35: C3.2.2 4622.2,2170 v1(4720,2170)
NetC4.2_2: C4.2.2 K13.7 R2.2.1 | length 1180.8
  Top Layer w35: v1(4780,1890) 4780,1972.6 4808.96,2001.55 4808.96,2009.43 4812.13,2012.6 R2.2.1
  Bottom Layer w35: C4.2.2 4530,2198.88 4460,2128.88 4460,1910.5 4480.5,1890 4570,1890 ; K13.7 4570,1890 ; v1(4780,1890) 4570,1890
NetC5.2_2: C5.2.2 K13.3 R3.2.1 U1.2.5 | length 2624.1
  Top Layer w35: K13.3 4910,1880 R3.2.1 4917.87,2015.2 4960,1973.07 v1(4960,1960)
  Bottom Layer w35: C5.2.2 4530,2600.5 4550.5,2580 4730,2580 5070,2240 5070,1960 ; v1(4960,1960) 5070,1960 ; U1.2.5 5565.59,2225.59 5300,1960 5070,1960
NetC6_2: C6.2 IC3.9 R5.2 | length 3413.3
  Top Layer w25: 3400,1450 3550,1450 3610,1510 3720,1510
  Top Layer w35: IC3.9 2540,2300 2550,2290 2800,2290 2800,2160 2900,2060 3260,2060 3350,1970 3610,1970 3610,1620 3720,1510 ; v1(2570,1210) 2540,1180 2540,1031.1 C6.2 2538.9,961.1 2542.6,957.4 R5.2 ; v1(3380,1430) 3400,1450
  Bottom Layer w35: v1(2570,1210) 3050,1210 3150,1310 3260,1310 v1(3380,1430)
NetC7_2: C7.2 IC2.5 R4.2 | length 623.5
  Top Layer w35: IC2.5 2690,660 2691.1,661.1 3041.1,661.1 ; R4.2 3030,562.6 3030,650 3041.1,661.1 ; C7.2 3041.1,661.1
NetC11_2: C11.2 IC3.17 L1.1 | length 248.6
  Top Layer w25: IC3.17@3341.91,2344.35 IC3.17 3340,2340.53 3358.9,2321.63 C11.2 C11.2@3361.06,2257.83 ; L1.1@3361.06,2112.17 L1.1@3363.23,2110
  Top Layer w35: L1.1@3361.06,2112.17 C11.2@3361.06,2257.83
NetC12_2: C12.2 IC3.10 R14..1 | length 1134.4
  Top Layer w25: v1(2720,2100) 2871.1,1948.9 C12.2 ; v1@2821.35,1600 2870,1600 C12.2@2870,1658.9
  Top Layer w35: R14..1 v1(2870,1455.25) ; C12.2@2870,1658.9 C12.2
  Bottom Layer w25: IC3.10 2640,2180 v1(2720,2100) ; v1(2820,1600) 2820,1520 2869.04,1470.96 2869.04,1456.21 v1(2870,1455.25)
NetC13_2: C13.2 IC2.3 R13.2 | length 484.5
  Top Layer w35: C13.2 2821.1,1074.84 IC2.3 2790,990 3012.6,990 R13.2
NetC14_1: C14.1 K11.3 | length 105.7
  Top Layer w35: C14.1@2829.7,3281.4 C14.1 2831.1,3271.54 2837.66,3264.98 2837.66,3182.34 K11.3
NetC14_2: C14.2 D3.2 IC3.29 | length 592.4
  Top Layer w25: C14.2 2774.86,3274.04 2774.86,3235.14 2790,3220 2790,3006.88 IC3.29@2840,2956.88
  Top Layer w35: D3.2 2579.06,3196.3 2662.76,3280 C14.2 ; IC3.29 IC3.29@2840,2956.88
  Bottom Layer w35: IC3.29 IC3.29@2840,2956.88
NetD1_2: D1.2 RE1.8 T1.1 | length 937.4
  Top Layer w35: D1.2 182.36,1473.07 RE1.8
  Bottom Layer w35: RE1.8 182.36,1575.28 T1.1
NetDS1.2_1: DS1.2.1 IC1.2.15 | length 1447.4
  Top Layer w25: v1(4600,730) IC1.2.15
  Top Layer w35: DS1.2.1 5230,1290 v1(5230,764.07)
  Bottom Layer w25: v1(4600,730) 4970,730 5005.81,765.81 5154.65,765.81 5156.38,764.07 v1(5230,764.07)
NetDS1.2_2: DS1.2.2 IC1.2.14 | length 1229.5
  Top Layer w25: IC1.2.14 4550,798.43 4568.88,779.54 4568.88,760.96 v1(4569.84,760)
  Top Layer w35: DS1.2.2 5160,1260 v1(5160,860)
  Bottom Layer w25: v1(4569.84,760) 4919.5,760 4950,790.5 4950,849.5 4970.5,870 5114.78,870 5124.78,860 v1(5160,860)
NetDS1.2_3: DS1.2.3 IC1.2.5 | length 656
  Top Layer w35: IC1.2.5 4650,1339.5 4670.5,1360 4870,1360 5010,1220 DS1.2.3
NetDS1.2_5: DS1.2.5 IC1.2.6 | length 615.3
  Top Layer w25: IC1.2.6 4600,1130.5 4650.5,1080 4970,1080 5030,1020 DS1.2.5
NetDS1.2_6: DS1.2.6 IC1.2.13 | length 926
  Top Layer w35: IC1.2.13 4500,710.5 4520.5,690 4999.5,690 5020,710.5 5020,899.5 5036.46,915.96 5095.96,915.96 DS1.2.6
NetDS1.2_7: DS1.2.7 IC1.2.9 | length 986.1
  Top Layer w25: IC1.2.9 4450,1024.64 4464.64,1010 4920,1010 4980.25,949.75 v1(4980.25,820)
  Bottom Layer w25: v1(4980.25,820) DS1.2.7
NetDS1.2_8: DS1.2.8 IC1.2.12 | length 853.2
  Top Layer w35: IC1.2.12 4450,660.5 4470.5,640 5020,640 DS1.2.8
NetDS1.2_11: DS1.2.11 IC1.2.7 | length 1136
  Top Layer w25: IC1.2.7 4550,1080.5 4590.5,1040 4950,1040 5020,970 v1(5060,970)
  Bottom Layer w25: v1(5060,970) 5330,970 5380,920 DS1.2.11
NetDS1.2_13: DS1.2.13 IC1.2.4 | length 922
  Top Layer w35: v1(4700,1120) IC1.2.4 ; v1(5290,1160) 5330,1120 DS1.2.13
  Bottom Layer w25: v1(4700,1120) 4880,1120 4930.74,1170.74 4979.26,1170.74 4980,1170 5120,1170 5130,1160 v1(5290,1160)
NetDS1.2_14: DS1.2.14 IC1.2.2 | length 790.7
  Top Layer w35: IC1.2.2 v1(4800,1270) ; v1(5290,1270) 5340,1220 DS1.2.14
  Bottom Layer w35: v1(4800,1270) v1(5290,1270)
NetDS1.2_15: DS1.2.15 IC1.2.8 | length 1254.3
  Top Layer w25: v1(4500,1110) IC1.2.8
  Bottom Layer w25: v1(4500,1110) 4540,1070 5325.36,1070 5409.7,1154.35 5409.7,1229.7 DS1.2.15
NetDS1.2_16: DS1.2.16 IC1.2.3 | length 1047
  Top Layer w35: IC1.2.3 v1(4750,1280)
  Bottom Layer w35: v1(4750,1280) 4750,1410 4860,1520 5230,1520 5330,1420 DS1.2.16
NetIC1.2_17: IC1.2.17 K13.4 | length 1592.5
  Top Layer w35: IC1.2.17 v1(4700,960)
  Bottom Layer w35: v1(4700,960) 4319.02,960 4260,1019.02 4260,1399.5 4280.5,1420 4550,1420 K13.4
NetIC1.2_18: IC1.2.18 K13.2 | length 1551.6
  Top Layer w35: IC1.2.18 v1(4750,940)
  Bottom Layer w35: v1(4750,940) 4750,990 4710,1030 4340.5,1030 4320,1050.5 4320,1280 4400,1360 4590,1360 K13.2
NetIC2_1: IC2.1 R11.2 R14..2 | length 332
  Top Layer w25: R14..2 2930,1242.6 R11.2
  Top Layer w35: R11.2 2990,1222.6 IC2.1
NetIC2_2: IC2.2 R12.1 R15.2 | length 631.7
  Top Layer w25: R15.2@2857.4,1222.6 2790,1290 2790,1525.36 2804.64,1540 R12.1
  Top Layer w35: R15.2@2857.4,1222.6 R15.2 2857.4,1202.6 2890,1170 IC2.2
NetIC2_6: IC2.6 R1.1 R8.2 | length 1397.4
  Top Layer w35: R1.1 2627.4,722.6 2630,720 2630,620 v1(2660,620) ; R8.2@2717.4,1350 2720,1347.4 v1(2720,1260)
  Bottom Layer w25: v1(2720,1260) 2550,1260 2510,1220 2510,1210 2635.71,1084.29 2735.71,1084.29 2740,1080 2740,1000 2790,950 IC2.6
  Bottom Layer w35: v1(2660,620) 2780,620 2790,630 IC2.6
NetIC2_7: IC2.7 R1.2 R5.1 | length 444.3
  Top Layer w35: R5.1 R1.2 2869.5,797.4 2890,776.9 IC2.7
NetIC3_1: 
NetIC3_2: IC3.2 K7.2 R16.1 | length 178.9
  Top Layer w25: R16.1 K7.2 IC3.2
NetIC3_7: IC3.7 K5.2 | length 136.3
  Top Layer w35: K5.2 IC3.7
NetIC3_8: IC3.8 K5.1 | length 136.3
  Top Layer w35: K5.1 IC3.8
NetIC3_9: 
NetIC3_10: 
NetIC3_11: 
NetIC3_12: IC3.12 K9.1 | length 144.4
  Top Layer w35: IC3.12 2874.7,2311.56 2874.7,2229.07 K9.1
NetIC3_13: IC3.13 K9.2 | length 135.6
  Top Layer w35: IC3.13 2940,2247.43 2962.52,2224.91 K9.2
NetIC3_14: IC3.14 K9.3 | length 126.8
  Top Layer w35: IC3.14 3040.63,2345.63 3040.63,2220.63 K9.3
NetIC3_15: IC3.15 K9.4 | length 134.5
  Top Layer w35: K9.4 3120,2224.91 3140,2244.91 IC3.15
NetIC3_16: IC3.16 K9.5 | length 149
  Top Layer w35: K9.5@3202.21,2223.47 K9.5 3200,2220 3240,2260 IC3.16
NetIC3_19: 
NetIC3_20: IC3.20 K4.1 | length 1061.2
  Top Layer w35: IC3.20 3640,2850 3990,3200 3990,3254.09 K4.1
NetIC3_21: IC3.21 K4.2 | length 389.1
  Top Layer w35: IC3.21 3840,3153.74 K4.2
NetIC3_22: IC3.22 K4.3 | length 365.9
  Top Layer w35: IC3.22 3684.09,3097.83 K4.3
NetIC3_23: IC3.23 K6.3 | length 126.3
  Top Layer w35: IC3.23 K6.3
NetIC3_24: IC3.24 K6.2 | length 126.3
  Top Layer w35: IC3.24 K6.2
NetIC3_27: IC3.27 K11.1 | length 314.3
  Top Layer w35: K11.1 3019.5,3180 3040,3159.5 IC3.27
NetIC3_28: IC3.28 K11.4 | length 175.8
  Top Layer w35: K11.4 K11.4@2845.73,3074.27
  Bottom Layer w35: K11.4 2845.73,3074.27 2845.73,3048.01 IC3.28
NetIC3_30: IC3.30 K11.5 | length 301.8
  Top Layer w35: IC3.30 2670,3023.74 2670,3140 2704.27,3174.27 2734.27,3174.27 K11.5
NetIC3_33: IC3.33 K10.1 | length 110.4
  Top Layer w25: K10.1 2435.86,3054.14 2435.86,2957.88 IC3.33
NetIC3_34: IC3.34 K10.2 | length 110.9
  Top Layer w25: IC3.34 2340,3042.72 2351.26,3053.98 K10.2
NetIC3_35: IC3.35 K12.4 R22.1 | length 728.3
  Top Layer w25: K12.4 2040,3375.36 2054.64,3390 2244.43,3390 2252.6,3381.83 R22.1
  Bottom Layer w25: 2089.77,3262.13 2089.77,3150.23 2090,3150
  Bottom Layer w35: K12.4 2040,3311.89 2089.77,3262.13 ; 2090,3150 2090,3103.74 IC3.35
NetIC3_36: IC3.36 K12.2 R21.1 | length 542
  Top Layer w25: K12.2@2131.89,3320 2089.77,3277.87 2089.77,3102.92 2140,3052.69 IC3.36
  Top Layer w35: K12.2@2131.89,3320 K12.2 2148.11,3320 2168.11,3300 2257.4,3300 R21.1
NetIC3_37: IC3.37 K12.3 | length 266.3
  Top Layer w35: IC3.37 K12.3
NetIC3_38: IC3.38 K12.5 | length 266.3
  Top Layer w35: IC3.38 K12.5
NetIC3_39: IC3.39 K12.7 | length 266.3
  Top Layer w35: IC3.39 K12.7
NetIC3_40: IC3.40 K12.9 | length 266.3
  Top Layer w35: IC3.40 K12.9
NetK2_2: K2.2 RE1.2 RE1.5 | length 2055.2
  Top Layer w35: RE1.5@180.27,2689.73 340,2530 340,2330 379.21,2290.79 RE1.2 ; v3(330,1940) 330,1630 240,1540 240,1040 240.63,1040.63 K2.2
  Bottom Layer w35: v3(330,1940) 477.64,2087.64 RE1.2
NetK3_2: K3.2 R2.1 R4.1 R9.2 R13.1 | length 802.5
  Top Layer w35: K3.2 2952.6,449.21 R4.1 2950,562.6 v1(2950,610) ; v1(3080,800) 3127.4,800 3157.4,830 R2.1 R13.1
  Bottom Layer w35: v1(2950,610) 2950,670 3049.5,670 3080,700.5 v1(3080,800)
NetK8_1: K8.1 L2.2 | length 268.1
  Top Layer w35: L2.2 3430.63,529.37 K8.1
NetK8_2: K8.2 L2.3 | length 251.6
  Top Layer w35: K8.2 3509.37,569.37 L2.3
NetL2_1: L2.1 T3.3 | length 312.4
  Top Layer w50: L2.1 3330,790 T3.3
NetR3_1: IC3.11 R3.1 R6.2 Z2.1 | length 2163.4
  Top Layer w35: R3.1 890,1898.55 892.02,1900.57 892.02,1950.51 892.02,1957.47 Z2.1 899.49,1950 1120,1950 v1@1130,1960 ; v1(2300,2020) 2560,2020 v1(2740,2200)
  Bottom Layer w35: v1(1130,1970) 1180,2020 v1(2300,2020) ; v1(2740,2200) IC3.11
NetR7_1: IC3.19 R7.1 | length 4186.8
  Top Layer w35: R7.1 2130,960 2230,1060 2230,2260 2290,2320 2290,2400 2300,2410 3540,2410 IC3.19
NetR7_2: R7.2 R10.2 T1.2 | length 372.2
  Top Layer w35: R7.2 690,962.6 T1.2 690,1327.4 R10.2
NetR11_1: R11.1 R12.2 | length 223.7
  Top Layer w35: R12.2 2970,1537.4 R11.1
NetR17_1: R17.1 T2.2 T4.1 T5.2 | length 790.9
  Top Layer w35: T4.1 3340,1462.6 R17.1 3287.4,1272.6 T2.2 3430,1390 T5.2
NetR18_1: R18.1 T3.1 | length 102.6
  Top Layer w35: T3.1 R18.1
NetR18_2: R18.2 T2.3 T5.1 | length 336
  Top Layer w35: T2.3 3507.4,1260 R18.2 3583.94,1237.4 T5.1
NetR19_1: IC3.1 R19.1 | length 2463.7
  Top Layer w35: IC3.1 1781.93,2346.26 1822.99,2387.32 2087.32,2387.32 v3(2340,2640) ; R19.1 3527.4,1877.4 v4(3530,1880)
  Bottom Layer w35: v3(2340,2640) 2540,2640 2798.94,2381.06 2798.94,2328.19 2800,2327.13 2800,2160 2900,2060 3260,2060 3390,1930 3509.5,1930 3530,1909.5 v4(3530,1880)
NetR19_2: R19.2 R20.2 T4.2 | length 244.2
  Top Layer w35: T4.2 3442.36,1689.76 R20.2 R19.2
VIN: BR1.1 C1.2 R3.2 R17.2 T2.1 T3.2 | length 3836.1
  Top Layer w35: R3.2 797.4,1730 BR1.1 1223.7,1246.3 C1.2 C1.2@1641.02,1246.3 ; v1(3020,1420) 3209.43,1420 3212.6,1416.83 R17.2 3212.6,1274.96 T2.1 3197.64,1202.36 3200,1200 3430,1200 T3.2
  Bottom Layer w30: 2410,1790 2780,1420 v1(3020,1420)
  Bottom Layer w35: C1.2 1726.8,1246.3 2270.5,1790 2410,1790
pads on no net: DS1.2.4 DS1.2.9 DS1.2.10 DS1.2.12 IC1.2.10 IC1.2.11 IC1.2.19 IC1.2.20 IC3.3 IC3.4 IC3.25 IC3.26 K1.MP1 K1.MP2 K2.MP1 K2.MP2 K3.MP1 K3.MP2 K8.MP1 K8.MP2 K12.6 K12.8 K13.6 K13.8 K13.9 RE1.4 U1.2.6 U1.2.7
copper on no net:
  other v2: 4330,140 5510,140 210,170 3970,220 1030,1710 1440,2260 3970,2670 3240,3330 4330,3350 5510,3350

## Polygon pours and split planes (outlines as drawn)
GND on Top Layer "GND_L01_P002" (solid, pour order 2): 4210,3480 5620,3480 5620,40 4210,40
GND on Top Layer "GND_L01_P005" (solid, pour order 5): 20,3510 4110,3510 4110,30 20,30
GND on Bottom Layer "GND_L02_P003" (solid, pour order 3): 4210,3480 5620,3480 5620,40 4210,40
GND on Bottom Layer "GND_L02_P004" (solid, pour order 4): 20,3510 4110,3510 4110,30 20,30

## Silkscreen, mask and mechanical layers (free items; w line width, h text height)
Top Overlay:
  text "LT 1EAIa" at 395,335 h250